# Altium PCB SD171-5.0PCB3.PcbDoc (part 3 of 5)
Units mm, origin at the board's own origin, x right, y up, seen from the top; angles counter-clockwise.
Board outline 152.27 x 99.6 mm, 6 copper layers (Top Layer, InternalPlane1, Mid-Layer 1, Mid-Layer 2, InternalPlane2, Bottom Layer); 397 components, 337 nets, 1868 pads, 651 vias.
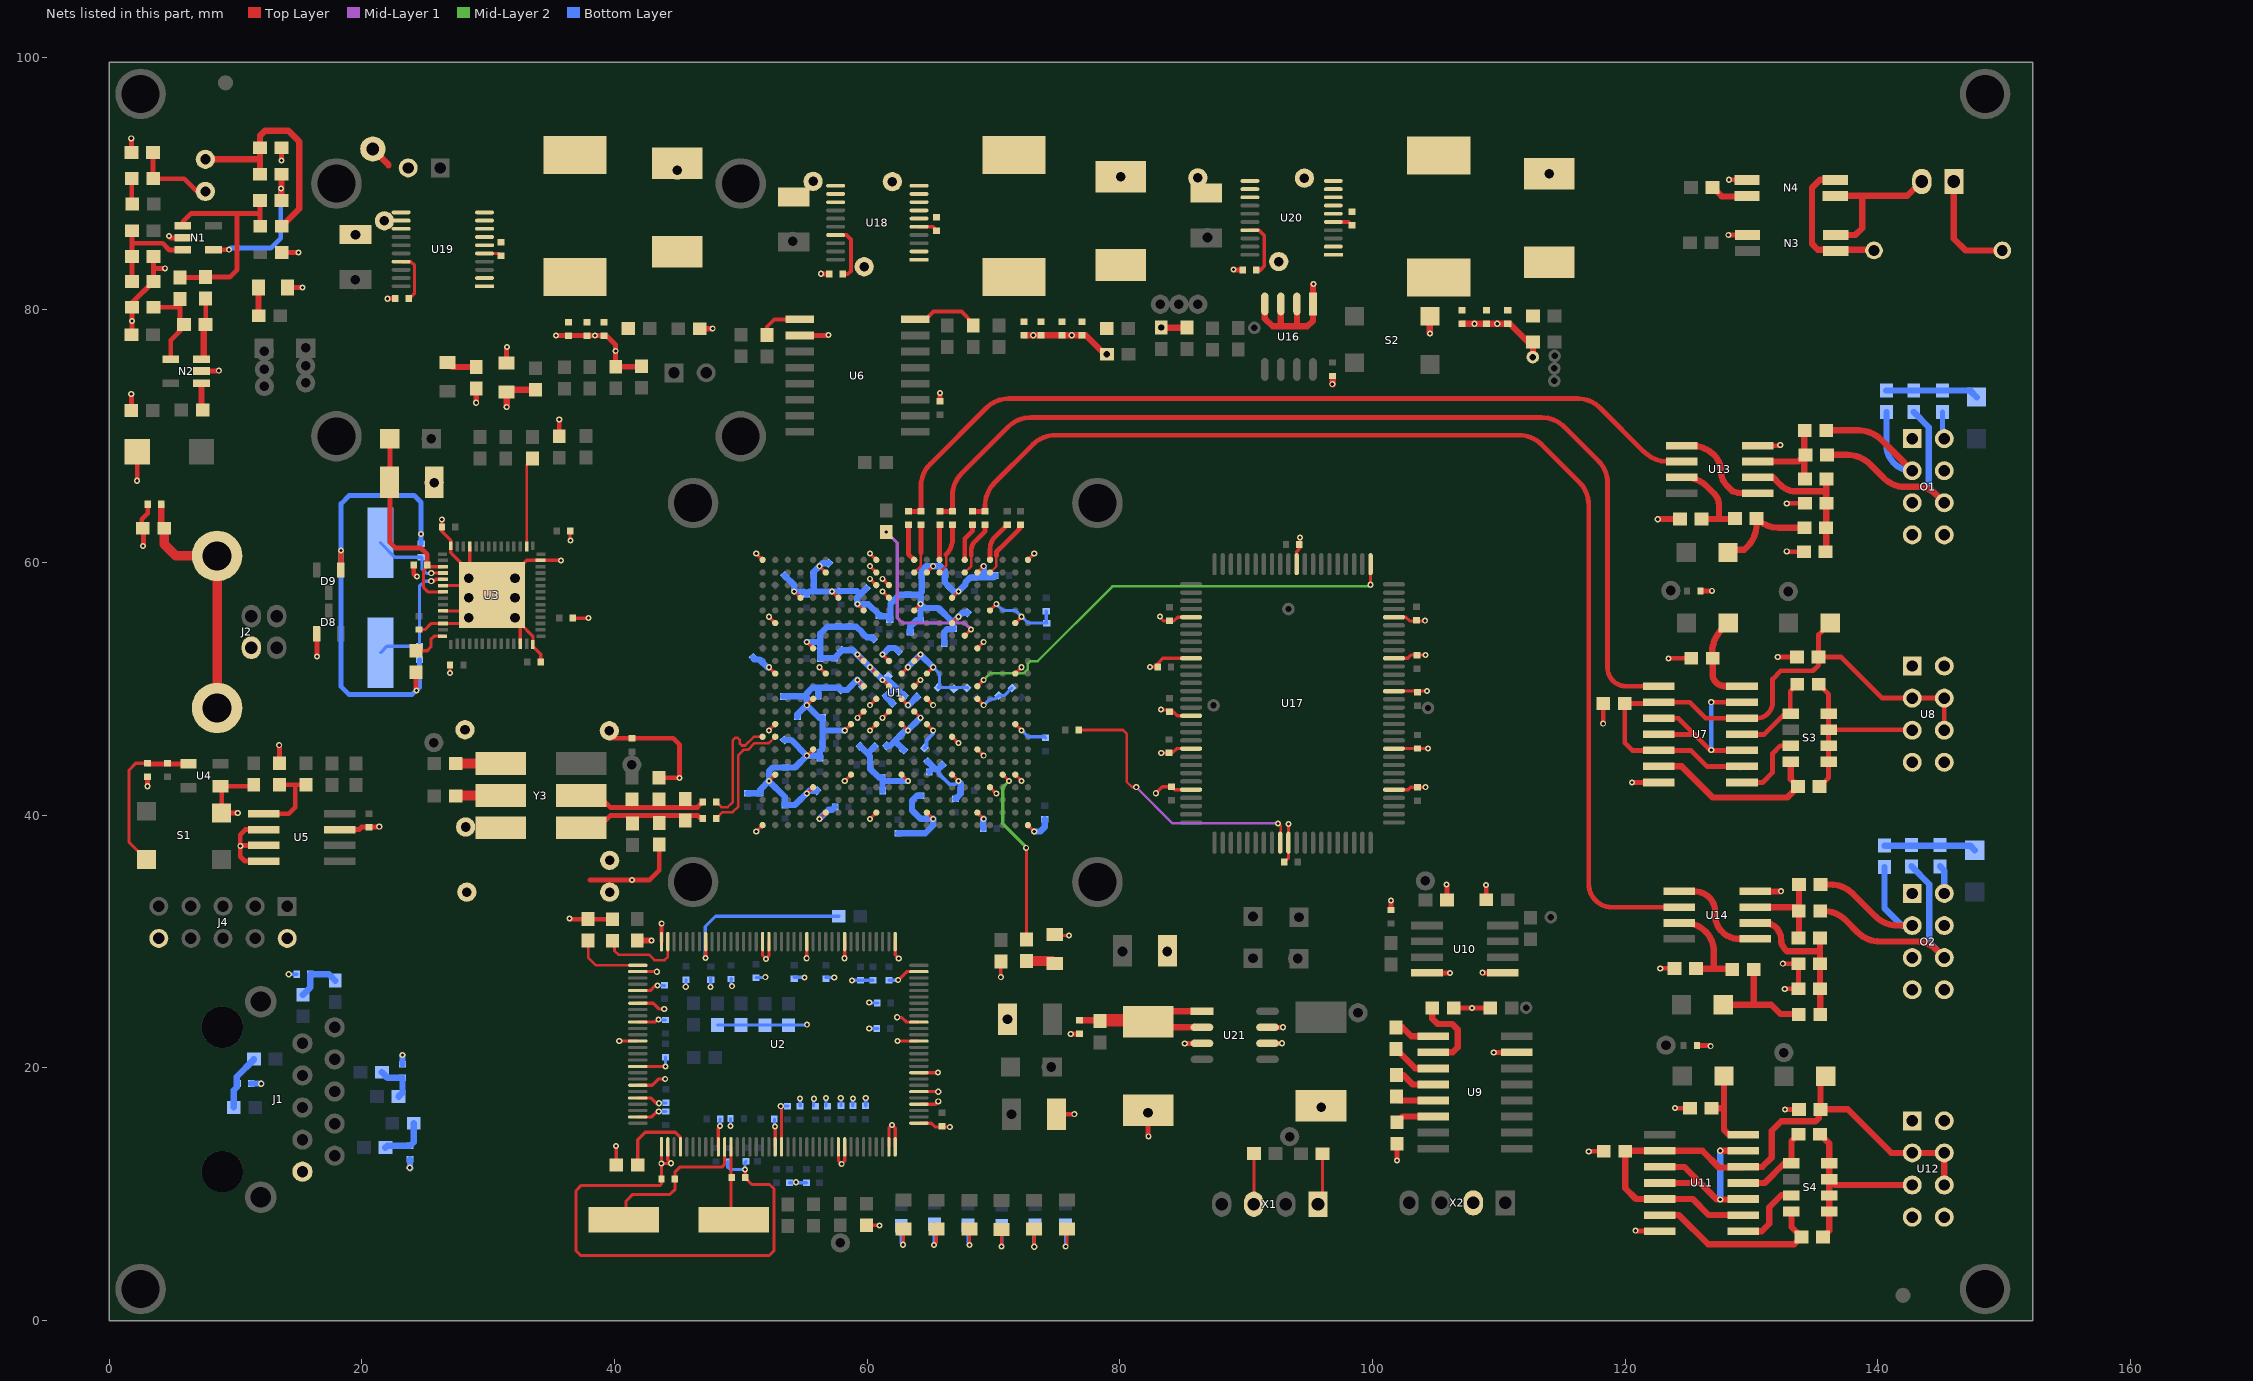
[diagram p7: the nets of this part, all layers, seen from the top]

## Via types
v1: diameter 0.483, hole 0.254, Top Layer to Bottom Layer, 651 vias

## Nets (pads, with @x,y where several pads share a name; then routed paths per layer and width w, separated by ;. In a path a pad name is that pad's centre, name@x,y a point inside that pad or via, vN(x,y) a via of type N, cw(c..) or ccw(c..) an arc to the next point about the centre after c; other vN are vias at no path point) (continued)
GND: C1.1 C2.1 C3.1 C4.1 C5.1 C6.1 C7.1 C8.1 C9.1 C10.1 C11.1 C12.1 C13.2 C14.1 C15.1 C16.1 C17.1 C18.1 C19.1 C20.2 C21.1 C22.1 C23.1 C24.1 C25.1 C26.1 C27.1 C28.1 C29.1 C30.2 C31.1 C32.1 C33.1 C34.1 C35.1 C36.1 C37.1 C38.1 C39.2 C40.1 C41.1 C42.1 C43.1 C44.1 C45.1 C46.1 C47.2 C48.2 C51.2 C53.1 C54.1 C56.2 C57.1 C58.1 C60.1 C61.2 C62.2 C64.1 C66.2 C68.2 C69.1 C71.2 C72.2 C73.2 C74.2 C76.2 C77.2 C78.2 C80.2 C82.1 C83.1 C84.1 C85.1 C86.1 C87.1 C88.1 C89.1 C90.1 C91.1 C92.1 C93.1 C94.1 C95.1 C96.1 C97.1 C98.1 C99.1 C100.1 C101.1 C102.1 C103.1 C104.1 C105.1 C106.1 C107.1 C108.1 C109.1 C110.1 C111.1 C112.1 C113.1 C114.1 C115.1 C116.1 C117.1 C118.1 C119.1 C120.1 C121.1 C122.1 C123.1 C124.1 C125.1 C126.1 C127.1 C128.1 C129.1 C130.1 C131.1 C132.1 C133.1 C134.1 C135.1 C136.1 C137.1 C138.1 C139.1 C140.1 C141.1 C142.1 C143.1 C144.1 C145.1 C146.1 C147.1 C148.1 C149.1 C150.1 C151.1 C152.1 C153.1 C154.1 C156.2 C157.2 C158.1 C159.1 C160.1 C161.1 C162.1 C163.1 C164.1 C165.1 C166.1 C167.1 C168.1 C169.1 C170.1 C171.1 C172.1 C173.1 C174.1 C175.1 C176.1 C177.1 C178.1 C179.1 C180.1 C181.1 C182.1 C183.1 C185.2 C186.2 C187.1 C188.1 C189.1 C190.1 C192.2 C193.2 C194.1 C195.1 C196.1 C197.2 C198.2 C199.1 C200.2 C201.2 C202.2 C204.2 C207.2 D7.2 D8.1 D9.1 D11.2 D12.2 D13.1 J1.10 J2.4 J4.2 J4.10 N1.2 N2.2 N3.3 N4.3 O1.1 O1.3 O1.4 O1.5 O1.7 O1.8 O2.1 O2.3 O2.4 O2.5 O2.7 O2.8 pad.0@55.731,90.174 pad.2@28.172,46.766 pad.2@28.223,39.07 pad.3@39.602,46.69 pad.4@28.324,33.913 pad.4@62.004,90.149 pad.5@25.733,66.324 pad.5@59.769,83.418 pad.6@21.796,87.05 pad.6@95.939,16.88 pad.7 pad.8 pad.9 pad.10@28.476,57.205 pad.10@32.134,57.205 pad.10@71.122,23.862 pad.11@28.476,58.755 pad.11@32.134,58.755 pad.12@20.879,92.735 pad.14@78.975,76.499 pad.14@83.276,78.603 pad.14@112.695,76.263 pad.21 pad.22 pad.23 pad.24 R1.1 R3.1 R13.1 R14.1 R18.2 R19.2 R20.2 R21.2 R26.1 R34.1 R36.1 R37.2 R41.2 R44.1 R47.2 R50.1 R51.1 R59.1 R63.2 R72.1 R86.1 R89.2 R90.2 R98.1 R105.1 R106.2 R110.1 R112.1 R114.1 R116.1 R118.1 S1.1 S2.2 U1.A1 U1.A22 U1.AA5 U1.AA9 U1.AA13 U1.AA17 U1.AB1 U1.AB22 U1.B5 U1.B9 U1.B13 U1.B17 U1.D4 U1.D18 U1.E2 U1.E7 U1.E11 U1.E15 U1.E21 U1.G5 U1.G18 U1.H7 U1.J2 U1.J9 U1.J11 U1.J13 U1.J15 U1.J21 U1.K10 U1.K12 U1.K14 U1.L5 U1.L9 U1.L11 U1.L13 U1.L18 U1.M10 U1.M12 U1.M14 U1.N2 U1.N9 U1.N11 U1.N13 U1.N17 U1.N21 U1.P10 U1.P12 U1.P14 U1.R5 U1.R18 U1.U2 U1.U7 U1.U21 U1.V4 U1.V10 U1.V14 U1.W7 U1.W16 U1.W19 U2.1 U2.9 U2.15 U2.21 U2.22 U2.38 U2.40 U2.43 U2.45 U2.48 U2.51 U2.55 U2.58 U2.60 U2.63 U2.65 U2.66 U2.74 U2.83 U2.84 U2.93 U2.94 U2.101 U2.102 U2.103 U2.106 U2.108 U2.111 U2.116 U2.119 U2.127 U3.6 U3.10 U3.12 U3.26 U3.28 U3.41 U3.53 U3.56 U3.57 U4.1 U5.2 U5.3 U5.4 U5.7 U6.10 U7.7 U8.1 U8.4 U8.5 U8.8 U9.15 U10.4 U10.5 U11.7 U12.1 U12.4 U12.5 U12.8 U13.4 U14.4 U16.1 U16.2 U16.3 U16.4 U17.5 U17.10 U17.17 U17.21 U17.26 U17.40 U17.55 U17.60 U17.67 U17.71 U17.76 U17.90 U18.1 U18.11 U18.12 U18.13 U19.1 U19.11 U19.12 U19.13 U20.1 U20.11 U20.12 U20.13 U21.3 U21.6 U21.7 X2.2 X3.2 Y3.3 | length 603.6
  Top Layer w0.254: C41.1@24.534,54.7 25.031,54.7 25.517,55.186 26.438,55.186 U3.12@26.449,55.175 28.049,55.175 U3.57@30.299,57.425 ; v1(26.343,63.403) 26.343,62.463 27.049,61.757 U3.56@27.049,61.325 27.054,61.32 27.054,60.787 30.299,57.541 U3.57@30.299,57.425 ; U3.10@26.449,56.175 29.049,56.175 U3.57@30.299,57.425 ; U3.6@26.449,58.175 29.549,58.175 U3.57@30.299,57.425 ; v1(26.978,51.262) 26.988,51.272 C42.1@26.988,51.895 ; U3.53@28.549,61.275 28.549,59.175 U3.57@30.299,57.425 ; U3.26@32.549,53.575 U3.57@32.549,55.175 ; C43.1@34.175,52.144 34.175,52.751 33.549,53.377 U3.28@33.549,53.525 33.549,54.175 U3.57@32.549,55.175 ; v1(35.766,60.164) v1@35.777,60.175 ; C48.2@36.498,62.51 36.498,61.778 v1(36.528,61.752) v1(36.528,61.752) ; C44.1@36.69,55.598 37.944,55.598 v1(37.951,55.605) ; v1(40.135,13.822) 40.14,13.817 R3.1@40.14,12.322 ; v1(40.389,22.128) 40.394,22.122 U2.51@41.855,22.122 ; U2.63@41.855,16.122 42.969,16.122 43.412,16.565 43.513,16.565 v1(43.513,16.54) ; U2.60@41.855,17.622 42.888,17.622 43.31,17.2 v1(43.539,17.2) ; U2.58@41.855,18.622 43.005,18.622 43.513,19.131 v1(44.021,19.131) ; U2.55@41.855,20.122 44.045,20.122 v1(44.047,20.121) ; U2.48@41.855,23.622 43.204,23.622 43.412,23.83 v1(43.488,23.83) ; U2.45@41.855,25.122 43.069,25.122 43.524,24.668 v1(43.945,24.668) ; U2.43@41.855,26.122 42.834,26.122 43.234,26.522 v1(43.412,26.522) ; U2.40@41.855,27.622 43.353,27.622 v1(43.361,27.614) ; U2.65@43.73,13.747 43.73,12.439 v1(43.716,12.425) ; U2.66@44.23,13.747 44.23,12.724 v1@44.453,12.501 ; v1(44.478,12.45) 44.453,12.425 v1@44.453,12.501 ; U2.74@48.23,13.747 48.23,15.186 48.415,15.371 48.39,15.397 v1(48.365,15.397) ; v1(50.346,11.968) 50.346,11.993 50.353,11.986 C5.1@50.353,11.308 50.887,10.774 52.276,10.774 52.632,10.418 52.632,5.516 52.276,5.161 37.316,5.161 36.96,5.516 36.96,10.266 37.392,10.698 43.615,10.698 43.728,10.811 C6.1@43.728,11.197 43.728,12.413 v1(43.716,12.425) ; v1(51.233,38.712) U1.A22@51.733,39.212 ; v1(51.233,60.712) U1.AB22@51.733,60.212 ; U2.22@51.73,29.997 51.73,28.897 v1(51.997,28.63) 52.23,28.863 U2.21@52.23,29.997 ; v1(52.233,42.712) U1.E21@52.733,43.212 ; v1(52.233,46.712) U1.J21@52.733,47.212 ; v1(52.233,51.712) U1.N21@52.733,51.212 ; v1(52.233,55.712) U1.U21@52.733,55.212 ; v1@52.708,15.448 52.73,15.426 U2.83@52.73,13.747 ; v1(53.165,16.972) 53.165,16.921 53.23,16.856 U2.84@53.23,13.747 ; v1(54.233,57.712) U1.W19@54.733,57.212 ; v1(55.223,28.681) 55.248,28.706 55.23,28.724 U2.15@55.23,29.997 ; v1(55.233,41.712) U1.D18@55.733,42.212 ; v1(55.233,44.712) U1.G18@55.733,45.212 ; v1(55.233,48.712) U1.L18@55.733,49.212 ; v1(55.233,53.712) U1.R18@55.733,53.212 ; v1(56.233,39.712) U1.B17@56.733,40.212 ; v1(56.233,51.712) U1.N17@56.733,51.212 ; v1(56.233,59.712) U1.AA17@56.733,59.212 ; v1(57.233,57.712) U1.W16@57.733,57.212 ; U2.93@57.73,13.747 57.73,12.661 v1(57.991,12.4) 58.23,12.638 U2.94@58.23,13.747 ; v1(58.22,28.681) 58.22,28.656 58.23,28.645 U2.9@58.23,29.997 ; v1(58.233,42.712) U1.E15@58.733,43.212 ; v1(58.233,46.712) U1.J15@58.733,47.212 ; v1(59.233,47.712) U1.K14@59.733,48.212 ; v1(59.233,50.712) U1.M14@59.733,50.212 ; v1(59.233,52.712) U1.P14@59.733,52.212 ; v1(59.233,56.712) U1.V14@59.733,56.212 ; R26.1@59.966,7.552 60.959,7.552 v1(60.988,7.523) ; v1(60.233,39.712) U1.B13@60.733,40.212 ; v1(60.233,46.712) U1.J13@60.733,47.212 ; v1(60.233,48.712) U1.L13@60.733,49.212 ; v1(60.233,51.712) U1.N13@60.733,51.212 ; v1(60.233,59.712) U1.AA13@60.733,59.212 ; v1(61.233,47.712) U1.K12@61.733,48.212 ; v1(61.233,50.712) U1.M12@61.733,50.212 ; v1(61.233,52.712) U1.P12@61.733,52.212 ; U2.101@61.73,13.747 61.73,15.224 v1(61.979,15.473) 62.23,15.222 U2.102@62.23,13.747 ; U2.1@62.23,29.997 62.23,28.938 v1(62.512,28.656) ; v1(62.385,24.007) 62.36,23.982 62.766,23.982 63.126,23.622 U2.119@64.105,23.622 ; v1(62.411,22.128) 62.416,22.122 U2.116@64.105,22.122 ; v1(62.462,26.954) 63.13,27.622 U2.127@64.105,27.622 ; U1.E11@62.733,43.212 v1(63.233,42.712) ; U1.J11@62.733,47.212 v1(63.233,46.712) ; U1.L11@62.733,49.212 v1(63.233,48.712) ; U1.N11@62.733,51.212 v1(63.233,51.712) ; U1.K10@63.733,48.212 v1(64.233,47.712) ; U1.M10@63.733,50.212 v1(64.233,50.712) ; U1.P10@63.733,52.212 v1(64.233,52.712) ; U1.V10@63.733,56.212 v1(64.233,56.712) ; U2.103@64.105,15.622 65.081,15.622 65.383,15.321 v1(66.551,15.321) ; U2.106@64.105,17.122 65.432,17.122 65.637,17.327 v1(65.637,17.353) ; U2.108@64.105,18.122 65.594,18.122 65.611,18.14 v1(65.637,18.115) ; U2.111@64.105,19.622 65.653,19.622 65.637,19.639 v1(65.611,19.639) ; U1.B9@64.733,40.212 v1(65.233,39.712) ; U1.J9@64.733,47.212 v1(65.233,46.712) ; U1.L9@64.733,49.212 v1(65.233,48.712) ; U1.N9@64.733,51.212 v1(65.233,51.712) ; U1.AA9@64.733,59.212 v1(65.233,59.712) ; U1.E7@66.733,43.212 v1(67.233,42.712) ; U1.H7@66.733,46.212 v1(67.233,45.712) ; U1.U7@66.733,55.212 v1(67.233,55.712) ; U1.W7@66.733,57.212 v1(67.233,57.712) ; U1.B5@68.733,40.212 v1(69.233,39.712) ; U1.G5@68.733,45.212 v1(69.233,44.712) ; U1.L5@68.733,49.212 v1(69.233,48.712) ; U1.R5@68.733,53.212 v1(69.233,53.712) ; U1.AA5@68.733,59.212 v1(69.233,59.712) ; U1.D4@69.733,42.212 v1(70.233,41.712) ; U1.V4@69.733,56.212 v1(70.233,56.712) ; v1(70.59,27.182) 70.591,27.184 R1.1@70.591,28.432 ; U1.E2@71.733,43.212 v1(72.233,42.712) ; U1.J2@71.733,47.212 v1(72.233,46.712) ; U1.N2@71.733,51.212 v1(72.233,51.712) ; U1.U2@71.733,55.212 v1(72.233,55.712) ; U1.A1@72.733,39.212 v1(73.233,38.712) ; U1.AB1@72.733,60.212 v1(73.233,60.712) ; D12.2@74.858,30.553 74.927,30.484 v1(75.974,30.484) ; v1(82.401,51.744) 82.406,51.75 C87.1@82.994,51.75 83.036,51.792 83.036,52.049 83.41,52.424 U17.60@85.653,52.424 ; v1(82.858,41.737) 83.376,42.254 C88.1@84.115,42.254 84.345,42.024 U17.76@85.653,42.024 ; v1(83.188,55.732) 83.188,55.656 83.467,55.376 84.28,55.376 84.577,55.674 U17.55@85.653,55.674 ; v1(83.264,48.366) 83.264,48.341 84.077,48.341 84.544,47.874 U17.67@85.653,47.874 ; v1(83.29,44.937) 83.34,44.937 83.348,44.929 84.171,44.929 84.515,45.274 U17.71@85.653,45.274 ; C84.1@93.034,36.283 93.353,36.602 U17.90@93.353,37.824 93.353,39.268 93.348,39.273 v1(93.348,39.298) ; U17.40@94.003,59.874 94.003,60.858 94.262,61.117 v1(94.262,61.98) ; U17.5@101.703,42.024 102.83,42.024 103.025,42.219 v1(104.194,42.219) ; U17.10@101.703,45.274 104.365,45.274 104.372,45.267 v1(104.397,45.293) ; U17.17@101.703,49.824 104.331,49.824 104.346,49.839 v1(104.321,49.839) ; U17.21@101.703,52.424 102.79,52.424 103.051,52.684 v1(104.194,52.684) ; U17.26@101.703,55.674 102.652,55.674 102.949,55.376 104.118,55.376 104.143,55.402 v1(104.168,55.402) ; U3.57@30.299,57.425 U3.57@32.549,55.175 ; U3.57@30.299,57.425 33.049,60.175 U3.41@34.149,60.175 v1@35.777,60.175 ; v1@35.777,60.175 35.779,60.177 35.792,60.177 35.79,60.175 v1@35.777,60.175 ; v1(43.716,12.425) 44.377,12.425 v1@44.453,12.501
  Top Layer w0.3: U2.38@43.73,29.997 43.73,31.412 v1(43.742,31.424)
  Top Layer w0.381: v1(2.213,66.476) 2.231,66.458 D13.1@2.231,68.761 ; v1(2.695,61.32) 2.721,61.295 2.721,62.67 2.594,62.797 2.594,63.428 3.06,63.894 C47.2@3.06,64.615 ; v1@3.051,42.296 C51.2@3.051,43.04 ; v1(10.188,40.187) 10.087,40.187 S1.1@8.918,40.187 8.918,42.188 U4.1@8.818,42.288 11.331,42.288 R50.1@11.452,42.41 ; v1@10.392,37.622 10.401,37.613 U5.3@12.249,37.613 ; U5.4@12.249,36.363 12.234,36.377 10.747,36.377 10.392,36.733 10.392,38.46 10.794,38.863 U5.2@12.249,38.863 ; v1(13.465,45.547) 13.484,45.527 R47.2@13.484,44.112 ; D8.1@16.453,54.367 16.453,52.566 v1(16.462,52.557) ; U5.7@18.249,38.863 19.786,38.863 19.993,39.07 21.415,39.07 21.441,39.095 v1(21.39,39.095) ; D9.1@18.354,59.425 18.354,60.951 v1(18.367,60.964) ; C40.1@24.125,59.821 24.125,59.092 24.336,58.882 24.362,58.907 v1(24.387,58.907) ; v1@24.285,49.865 R37.2@24.285,51.325 ; R34.1@35.639,69.994 v1(35.639,71.328) ; v1(36.452,31.831) 36.452,31.805 36.427,31.78 36.439,31.767 R13.1@40.008,31.767 ; 38.052,34.879 v1(41.405,34.879) 42.802,34.879 43.558,35.635 R44.1@43.558,37.676 ; pad.3@39.576,46.334 39.823,46.088 C53.1@41.379,46.088 44.649,46.088 45.164,45.572 v1(45.164,42.956) 45.139,42.956 45.133,42.961 R41.2@43.54,42.961 ; C13.2@74.985,16.329 76.399,16.329 v1(76.406,16.337) ; v1(76.127,22.687) 76.136,22.696 C199.1@76.832,22.696 ; C198.2@82.242,16.638 82.242,14.654 82.223,14.635 v1(82.274,14.584) ; C80.2@101.47,32.5 101.47,33.247 v1(101.476,33.253) ; C64.1@101.953,14.004 101.953,12.685 v1(101.959,12.679) ; v1(105.87,34.523) 105.901,34.492 C62.2@105.901,33.302 ; C60.1@106.443,24.737 v1(107.877,24.737) 109.324,24.737 C58.1@109.33,24.743 ; v1(108.994,34.472) 108.969,34.472 109.007,34.434 C61.2@109.007,33.304 ; v1(109.604,21.213) 109.621,21.23 U9.15@111.427,21.23 ; v1(117.122,13.39) 117.14,13.408 C68.2@118.305,13.408 ; v1(118.265,47.248) 118.28,47.263 C56.2@118.28,48.841 ; v1(120.551,42.6) 120.56,42.591 U7.7@122.654,42.591 ; v1(120.831,7.116) 120.865,7.082 U11.7@122.755,7.082 ; v1(122.583,63.428) v1@122.601,63.446 ; v1(122.787,27.868) 122.787,27.894 123.886,27.894 C77.2@123.918,27.861 ; v1(123.447,52.405) 123.465,52.423 C66.2@125.239,52.423 ; v1(123.955,16.819) 123.962,16.812 C73.2@125.138,16.812 ; C139.1@125.691,21.765 126.615,21.765 126.622,21.772 126.673,21.721 v1(126.774,21.721) ; C140.1@125.971,57.757 126.869,57.757 v1(126.876,57.764) ; v1(128.171,85.933) 128.179,85.925 N3.3@129.697,85.925 ; v1(128.222,90.301) 128.23,90.294 N4.3@129.646,90.294 ; U13.4@130.499,69.251 132.28,69.251 132.286,69.245 v1(132.286,69.296) ; v1(132.083,52.532) 132.084,52.53 C57.1@133.612,52.53 ; v1(132.489,28.249) 132.439,28.249 132.431,28.242 C78.2@133.723,28.242 133.723,26.283 R86.1@133.739,26.267 132.666,26.267 v1(132.642,26.243) ; v1(132.667,16.718) 132.642,16.718 132.64,16.716 C69.1@133.765,16.716 ; v1(132.794,64.673) 132.812,64.691 C72.2@134.231,64.691 ; v1@132.87,60.888 132.845,60.863 132.769,60.863 132.77,60.861 R72.1@134.171,60.861
  Top Layer w0.4: v1(1.756,73.334) 1.761,73.329 R105.1@1.761,72.037 ; v1(1.756,93.578) 1.77,93.564 C207.2@1.77,92.453 ; C201.2@1.77,78.026 1.821,78.077 v1(1.821,79.125) C204.2@1.821,80.21 1.821,80.555 C202.2@3.513,82.248 3.522,82.257 3.522,83.342 ; R98.1@3.522,84.223 3.522,83.342 ; v1(4.423,83.291) 3.573,83.291 3.522,83.342 ; v1(4.753,85.856) 4.727,85.856 4.881,85.703 N1.2@5.838,85.703 ; N2.2@7.32,75.156 8.682,75.156 8.69,75.163 v1(8.69,75.188) ; v1(13.643,91.825) 13.648,91.831 R106.2@13.648,92.84 ; C200.2@13.673,84.534 14.962,84.534 14.964,84.536 v1(14.989,84.536) ; D7.2@14.119,81.784 15.303,81.784 v1(15.319,81.767) ; v1(22.05,80.878) 22.057,80.885 C183.1@22.651,80.885 ; v1(29.061,72.648) 29.068,72.656 R51.1@29.068,73.78 ; D11.2@31.475,75.791 31.475,77.044 v1(31.499,77.068) ; v1(35.385,77.982) 35.36,77.982 35.376,77.966 C187.1@36.37,77.966 C188.1@37.818,77.966 v1(38.459,77.966) C189.1@39.164,77.966 39.364,77.966 40.104,77.226 v1(40.104,76.738) R63.2@40.104,75.497 42.107,75.497 R59.1@42.142,75.531 ; C94.1@46.753,78.508 47.773,78.508 v1(47.78,78.516) ; U6.10@54.659,77.975 56.765,77.975 56.797,78.008 v1(56.95,78.008) ; v1(56.366,82.859) 56.367,82.857 C154.1@57.011,82.857 ; v1(65.764,73.41) 65.771,73.403 C45.1@65.771,72.759 ; v1(85.144,21.925) 85.16,21.941 U21.3@86.509,21.941 ; v1(89.005,83.189) 89.032,83.162 C190.1@89.726,83.162 ; U21.6@91.697,21.941 92.831,21.941 v1(92.84,21.95) ; U21.7@91.697,23.211 92.9,23.211 92.916,23.195 v1(92.916,23.22) ; U10.4@104.324,27.523 106.139,27.523 v1(106.15,27.513) ; v1(108.715,27.538) 108.73,27.523 U10.5@110.324,27.523
  Top Layer w0.5: pad.12@20.879,92.735 22.123,91.491 22.123,91.44 ; R110.1@41.805,30.082 42.925,30.082 v1(42.929,30.078) ; C158.1@72.438,77.991 C159.1@73.784,77.991 ; v1(73.155,77.991) C159.1@73.784,77.991 ; C142.1@78.983,76.491 78.812,76.491 77.312,77.991 C161.1@77.01,77.991 v1(76.203,77.991) C160.1@75.435,77.991 C159.1@73.784,77.991 ; R90.2@83.284,78.596 R89.2@85.316,78.596 ; U16.4@91.486,80.47 91.486,79.311 92.103,78.694 92.738,78.694 ; U16.3@92.756,80.47 92.756,78.712 92.738,78.694 ; U16.2@94.026,80.47 94.026,78.701 94.034,78.694 ; U16.1@95.296,80.47 U16.1@95.304,80.463 ; v1(95.329,82.046) 95.304,82.021 U16.1@95.304,80.463 ; v1(96.828,74.122) 96.879,74.122 96.855,74.145 C46.1@96.855,74.767 ; S2.2@104.543,79.498 104.543,78.141 v1(104.549,78.135) ; C194.1@107.109,78.906 v1(108.08,78.906) C195.1@109.04,78.906 v1(109.883,78.906) C196.1@110.716,78.906 110.865,78.906 112.323,77.448 C162.1@112.708,77.448 112.708,76.26 pad.14@112.703,76.255 ; v1@122.601,63.446 C74.2@124.35,63.446 ; U14.4@130.296,33.97 132.317,33.97 v1(132.337,33.99) ; 92.738,78.694 94.034,78.694 ; 94.034,78.694 94.847,78.694 95.304,79.151 U16.1@95.304,80.463
  Mid-Layer 1 w0.254: v1(35.766,60.164) v1@35.766,60.177
  Bottom Layer w0.254: v1(14.227,27.411) C1.1@14.87,27.411 ; v1(43.412,26.522) 43.962,26.522 C8.1@43.972,26.532 ; v1(43.488,23.83) 43.528,23.789 C9.1@44.048,23.789 ; v1(43.513,16.54) 43.522,16.549 C12.1@44.066,16.549 ; v1(43.539,17.2) 43.572,17.233 C11.1@44.072,17.233 ; v1(44.047,20.121) C10.1@44.046,20.84 ; v1@45.672,26.522 C21.1@45.672,26.987 ; v1@45.672,26.522 v1@45.672,26.573 ; v1@47.628,26.522 C18.1@47.628,27.088 ; v1@47.628,26.522 v1@47.653,26.547 ; R21.2@48.163,23.403 55.203,23.403 55.223,23.423 v1(55.248,23.423) ; v1(48.365,15.397) 48.365,15.952 C16.1@48.374,15.961 ; R112.1@48.98,12.594 48.98,12.14 49.152,11.968 v1(50.346,11.968) 50.346,12.537 50.402,12.594 R118.1@50.428,12.619 ; C26.1@49.194,16.001 49.194,15.406 v1(49.203,15.397) ; C31.1@49.228,27.038 C31.1@49.236,27.038 ; C31.1@49.254,27.055 C31.1@49.236,27.038 ; v1(49.304,26.471) 49.236,26.54 C31.1@49.236,27.038 ; C32.1@51.215,27.148 51.962,27.148 51.971,27.157 v1(51.946,27.182) ; C15.1@52.666,15.961 52.666,15.489 v1@52.708,15.448 ; v1(53.165,16.972) 53.174,16.981 C25.1@53.718,16.981 ; R116.1@53.857,10.917 v1@54.562,10.917 ; C33.1@54.238,27.173 55.028,27.173 v1(55.045,27.157) ; v1(54.384,10.952) 54.419,10.917 v1@54.562,10.917 ; v1(54.689,17.581) 54.709,17.601 C17.1@54.709,16.981 ; R114.1@55.203,10.917 v1@54.562,10.917 ; C14.1@55.75,16.981 55.75,17.601 55.756,17.607 v1(55.807,17.556) ; C34.1@56.721,27.165 57.399,27.165 v1(57.407,27.157) ; C27.1@56.741,17.006 56.741,17.601 v1(56.747,17.607) ; C97.1@57.9,57.712 C97.1@57.935,57.748 ; v1(57.915,17.607) 57.935,17.587 C29.1@57.935,17.006 ; v1(58.804,26.928) 58.812,26.936 C22.1@60.455,26.936 ; C24.1@58.875,17.006 58.875,17.576 v1(58.88,17.581) ; C19.1@59.891,17.006 59.891,17.677 59.896,17.683 v1(59.896,17.607) ; v1(60.176,23.118) 60.183,23.111 C36.1@60.87,23.111 ; v1(60.176,25.176) 60.15,25.15 60.099,25.15 60.106,25.143 C23.1@60.845,25.143 ; C28.1@61.75,26.936 62.429,26.936 62.436,26.928 v1(62.462,26.954) ; v1(65.233,51.712) 65.728,51.217 65.728,50.227 C115.1@65.623,50.122 67.934,50.122 C147.1@67.985,50.071 ; v1(69.233,48.712) 69.242,48.712 69.738,49.207 70.156,49.207 C143.1@70.42,49.472 70.873,49.472 C153.1@71.476,50.075 ; v1(70.233,56.712) 70.728,56.217 71.728,56.217 v1(72.233,55.712) 72.242,55.712 72.738,55.217 C146.1@74.216,55.217 ; v1(72.233,46.712) 72.738,46.207 73.027,46.207 ; 73.028,46.207 74.056,46.207 C149.1@74.122,46.141 ; C144.1@74.182,56.138 74.182,55.25 C146.1@74.216,55.217 ; C146.1@74.224,55.209 C146.1@74.216,55.217
  Bottom Layer w0.3: C179.1@64.552,45.332 64.715,45.494 64.715,45.927 65.233,46.445 v1(65.233,46.712) ; 65.662,43.642 65.662,43.312 66.525,42.449 66.978,42.449 67.233,42.703 v1(67.233,42.712)
  Bottom Layer w0.381: C38.1@24.564,52.311 24.564,50.118 24.006,49.56 18.977,49.56 18.367,50.169 v1(18.367,60.964) 18.367,64.673 19.002,65.308 24.158,65.308 24.692,64.774 v1(24.692,62.26) 24.692,61.501 C37.1@24.712,61.481 ; C71.2@145.121,71.926 145.121,69.959 O1.8@145.27,69.81
  Bottom Layer w0.5: C112.1@50.549,41.737 50.558,41.746 C128.1@51.534,41.746 51.534,42.013 v1(52.233,42.712) ; C99.1@50.993,52.47 51.132,52.331 51.489,52.331 52.099,51.721 v1@52.233,51.721 ; C116.1@53.353,49.406 55.174,49.406 55.223,49.357 v1@55.223,48.723 ; C123.1@53.449,45.96 53.986,45.96 v1(55.233,44.712) ; C96.1@53.487,58.969 54.233,58.223 v1(54.233,57.712) 54.998,57.712 C98.1@55.217,57.494 55.436,57.712 v1(57.233,57.712) C97.1@57.9,57.712 ; C119.1@54.48,47.791 54.48,47.98 v1@55.223,48.723 ; 55.223,49.636 55.669,50.082 57.788,50.082 C173.1@57.952,49.918 58.439,49.918 v1(59.233,50.712) 59.654,50.292 C166.1@59.654,50.198 ; v1(55.233,53.712) 56.288,53.712 56.3,53.7 ; 55.792,57.724 C95.1@55.792,59.032 55.792,59.271 v1(56.233,59.712) 56.472,59.951 C101.1@56.961,59.951 ; C126.1@56.021,41.943 55.429,41.943 54.292,40.806 C127.1@53.49,40.806 53.49,41.455 v1(52.233,42.712) ; C117.1@56.146,49.426 56.146,50.015 ; v1(56.233,39.712) 56.955,40.434 57.238,40.434 C130.1@57.467,40.663 ; C97.1@57.935,57.748 59.176,57.748 59.456,57.468 ; v1(58.233,46.712) 56.53,46.712 56.476,46.766 ; C175.1@59.447,45.459 60.009,44.897 ; C100.1@59.933,57.945 59.456,57.468 ; C164.1@60.494,53.963 60.371,54.085 59.973,54.085 59.606,54.453 59.606,54.473 59.151,54.928 C163.1@58.57,54.928 C182.1@57.757,54.928 56.848,54.928 56.3,54.38 56.3,53.7 ; C176.1@60.59,45.433 60.054,44.897 60.009,44.897 ; C124.1@61.227,41.938 61.227,42.676 61.263,42.712 v1(63.233,42.712) ; C122.1@61.227,42.967 C122.1@61.191,43.003 60.915,43.003 60.237,43.682 C121.1@60.237,43.995 60.237,44.669 60.009,44.897 ; v1(61.233,52.712) 61.764,53.243 62.219,53.243 C167.1@62.491,52.97 ; C177.1@61.556,45.511 61.83,45.511 62.213,45.894 ; C178.1@62.016,48.852 61.53,49.338 C174.1@61.53,49.472 62.063,50.004 C170.1@62.063,50.299 ; C131.1@62.461,38.569 64.603,38.569 65.233,39.199 v1(65.233,39.712) 64.232,39.712 63.554,40.39 63.554,41.159 63.934,41.539 C134.1@64.278,41.539 ; C136.1@62.905,45.169 62.213,45.86 62.213,45.894 ; C171.1@62.957,49.459 62.117,50.299 C170.1@62.063,50.299 ; v1(63.233,48.712) 63.295,48.712 C172.1@63.95,49.367 ; v1(63.233,51.712) v1(64.233,52.712) v1(65.233,51.712) ; C168.1@63.421,54.471 63.421,54.939 63.918,55.436 C114.1@64.234,55.436 v1(64.233,56.712) ; v1(64.233,47.712) v1(63.233,46.712) 63.031,46.712 C181.1@62.662,46.343 62.213,45.894 ; C138.1@64.806,44.254 65.418,43.642 65.662,43.642 65.662,43.674 C150.1@65.945,43.957 ; C135.1@64.918,43.438 65.172,43.692 ; C169.1@66.104,53.597 66.104,54.498 66.331,54.725 C113.1@66.799,54.725 ; C113.1@66.825,54.75 C113.1@66.799,54.725 ; C132.1@67.003,41.288 67.424,41.709 C152.1@67.424,41.958 67.424,42.513 v1@67.233,42.703 ; C145.1@67.931,56.034 67.554,56.034 v1(67.233,55.712) 66.799,55.279 ; C133.1@69.202,38.961 69.202,39.681 v1(69.233,39.712) ; v1(69.233,59.712) 69.233,58.926 69.345,58.814 ; C107.1@70.167,58.976 70.005,58.814 69.345,58.814 ; v1(73.233,38.712) 73.712,38.712 74.068,39.068 C151.1@74.068,39.694 ; C76.2@144.929,35.949 145.27,35.609 O2.8@145.27,33.81 ; v1(52.233,42.712) 52.233,43.471 52.539,43.778 C129.1@53.541,43.778 54.298,43.778 v1(55.233,44.712) ; v1@55.223,48.723 v1(55.233,48.712) 56.221,47.724 C118.1@56.502,47.724 56.476,47.699 56.476,46.766 ; v1(55.233,44.712) 56.06,44.712 C125.1@56.258,44.514 56.258,45.058 56.476,45.276 C120.1@56.476,45.667 56.476,46.766 ; 56.3,53.7 C104.1@56.3,52.403 56.336,52.439 C105.1@57.427,52.439 57.962,52.974 C165.1@57.962,53.051 58.895,53.051 v1(59.233,52.712) 59.245,52.712 61.233,50.725 v1(61.233,50.712) 61.649,50.712 C170.1@62.063,50.299 ; 59.456,57.468 59.233,57.245 v1(59.233,56.712) 60.107,56.712 60.957,55.862 C102.1@60.957,55.792 60.992,55.757 61.598,55.757 61.796,55.56 C103.1@61.796,55.462 61.86,55.526 61.86,56.756 62.547,57.443 C137.1@63.243,57.443 64.104,57.443 ; 64.104,57.443 64.326,57.665 C106.1@64.326,58.981 64.326,59.375 64.664,59.712 65.822,59.712 66.145,59.39 66.145,58.438 C108.1@66.502,58.081 66.87,57.712 v1(67.233,57.712) 67.796,58.275 67.796,58.45 68.16,58.814 C111.1@68.501,58.814 69.345,58.814 ; 64.104,57.443 64.24,57.307 64.24,56.719 v1@64.234,56.713 ; v1(64.233,56.712) v1@64.234,56.713 ; v1(64.233,56.712) v1(64.233,56.712) v1@64.234,56.713 ; v1(64.233,56.712) 64.544,56.401 C109.1@65.275,56.401 65.653,56.401 66.776,55.279 66.799,55.279 ; C113.1@66.799,54.725 66.799,55.279
  Bottom Layer w0.508: C2.1@11.267,18.766 12.026,18.766 v1(12.043,18.75) ; v1(23.219,21.01) 23.219,20.959 23.226,20.952 C3.1@23.226,20.293 ; v1(23.803,12.095) 23.828,12.069 23.854,12.069 23.82,12.103 C4.1@23.82,12.761
  other v1: 52.708,15.371 47.603,26.395 45.647,26.42 10.392,37.571 3.051,42.295 24.336,49.865 132.794,60.888
LBO#: U1.M5 U17.31 | length 36.5
  Top Layer w0.203: U17.31@99.825,59.902 99.85,59.876 U17.31@99.853,59.874 ; v1(99.85,58.247) U17.31@99.85,59.874
  Top Layer w0.254: U1.M5@68.733,50.212 v1(69.233,50.712)
  Mid-Layer 2 w0.203: v1(69.233,50.712) 69.763,51.242 72.428,51.242 72.703,51.518 72.703,51.978 72.926,52.201 73.511,52.201 79.416,58.107 79.441,58.132 99.736,58.132 v1(99.85,58.247) v1@99.85,58.348
MCLKIN: C50.2 U1.H21 | length 9.7
  Top Layer w0.203: C50.2@48.07,39.754 48.555,40.238 49.355,40.238 49.812,40.695 49.812,44.759 50.222,45.168 50.564,45.168 51.108,45.712 52.233,45.712 U1.H21@52.733,46.212
MCLKIN/: C49.2 U1.H22 | length 9.7
  Top Layer w0.203: C49.2@48.07,41.049 48.475,40.644 48.974,40.644 49.355,41.025 49.355,45.928 49.558,46.131 49.762,46.131 49.939,45.953 49.939,45.674 50.092,45.521 50.346,45.521 51.037,46.212 U1.H22@51.733,46.212
  Top Layer w0.254: C49.2@48.06,41.059 C49.2@48.07,41.049
MGT_REFCLK0N: U1.W12 | length 0.7
  Top Layer w0.254: v1(61.233,57.712) U1.W12@61.733,57.212
MGT_REFCLK0P: U1.Y12 | length 0.7
  Top Layer w0.254: v1(61.233,58.712) U1.Y12@61.733,58.212
MGT_REFCLK1N: U1.Y13 | length 0.7
  Top Layer w0.254: v1(60.233,58.712) U1.Y13@60.733,58.212
MGT_REFCLK1P: U1.AB13 | length 0.7
  Top Layer w0.254: v1(60.233,60.712) U1.AB13@60.733,60.212
NetC1_2: C1.2 R5.1 R6.1 | length 4.1
  Bottom Layer w0.508: R6.1@15.346,25.791 15.35,25.791 15.929,26.37 15.929,27.404 C1.2@15.936,27.411 17.408,27.411 R5.1@17.911,26.908
NetC2_2: C2.2 R7.1 R8.1 | length 4.5
  Bottom Layer w0.508: R8.1@9.871,16.87 9.871,18.229 10.112,18.47 10.112,19.308 11.471,20.667 R7.1@11.471,20.705
NetC3_2: C3.2 R9.1 R10.1 | length 3.4
  Bottom Layer w0.508: R9.1@21.6,19.655 22.048,19.207 23.207,19.207 C3.2@23.226,19.226 23.226,18.04 R10.1@22.919,17.732
NetC4_2: C4.2 R11.1 R12.1 | length 3.9
  Bottom Layer w0.508: R12.1@21.878,13.694 22.012,13.828 C4.2@23.82,13.828 24.114,14.122 R11.1@24.114,15.617
NetC5_2: C5.2 U2.76 Y1.1 | length 5.9
  Top Layer w0.254: U2.76@49.23,13.747 49.23,12.427 49.228,12.425 49.228,12.4 49.228,8.177 Y1.1@49.433,7.973
NetC6_2: C6.2 U2.75 Y1.2 | length 12.8
  Top Layer w0.254: Y1.2@40.922,8.162 40.922,9.453 41.456,9.987 44.402,9.987 44.809,10.393 44.809,11.79 45.164,12.146 48.492,12.146 48.72,12.374 48.72,13.738 U2.75@48.73,13.747
  Top Layer w0.381: Y1.2@40.733,7.973 Y1.2@40.922,8.162
NetC37_2: C37.2 U3.4 Y2.2 | length 6.5
  Top Layer w0.254: v1(25.505,59.161) 25.519,59.175 U3.4@26.449,59.175
  Bottom Layer w0.254: Y2.2@21.491,61.574 21.491,61.549 22.625,60.415 C37.2@24.712,60.415 24.768,60.358 24.768,59.517 25.149,59.136 v1@25.505,59.136
NetC38_2: C38.2 U3.5 Y2.1 | length 9.9
  Top Layer w0.254: v1@25.708,58.526 25.857,58.675 U3.5@26.449,58.675
  Bottom Layer w0.254: Y2.1@21.491,52.874 21.995,53.377 C38.2@24.564,53.377 24.564,58.119 24.971,58.526 v1(25.505,58.526)
NetC39_1: C39.1 C40.2 L2.1 U3.3 U3.7 | length 17.1
  Top Layer w0.254: C40.2@25.218,59.846 25.187,59.877 25.187,59.821 25.187,59.669 24.895,59.377 24.895,58.018 25.238,57.675 25.809,57.675 U3.7@26.449,57.675 ; C40.2@25.389,59.675 U3.3@26.449,59.675
  Top Layer w0.381: L2.1@22.228,69.804 22.228,61.599 22.685,61.142 24.692,61.142 25.187,60.647 C40.2@25.187,59.877
NetC47_1: C47.1 J2.5 J2.6 R36.2 | length 19.9
  Top Layer w0.508: C47.1@4.127,64.615 4.127,62.966 R36.2@4.377,62.716
  Top Layer w0.762: R36.2@4.377,62.716 4.377,61.442 5.288,60.531 J2.5@8.555,60.531 J2.6@8.555,48.491
NetC49_1: C49.1 R40.1 R41.1 R42.2 Y3.5 | length 10.2
  Top Layer w0.381: Y3.5@37.391,41.559 38.738,41.559 39.678,40.619 46.573,40.619 C49.1@47.003,41.049
NetC50_1: C50.1 R42.1 R43.2 R44.2 Y3.4 | length 10.1
  Top Layer w0.381: Y3.4@37.391,39.019 38.738,39.019 39.703,39.984 46.587,39.984 46.766,39.804 C50.1@47.029,39.804
NetC51_1: C51.1 C52.2 S1.2 U4.3 | length 12.6
  Top Layer w0.254: S1.2@2.949,36.504 1.578,37.876 1.578,43.565 2.119,44.106 C51.1@3.051,44.106
  Top Layer w0.381: C51.1@3.051,44.106 3.091,44.066 U4.3@6.278,44.066
NetC55_1: C55.1 C65.1 S3.5 S3.6 S3.7 S3.8 U8.3 | length 15.4
  Top Layer w0.381: C55.1@135.323,50.365 136.114,49.574 S3.7@136.114,46.764 ; C65.1@135.399,42.263 136.114,42.978 S3.6@136.114,45.494 S3.7@136.114,46.764 ; U8.3@142.73,46.73 142.696,46.764 S3.7@136.114,46.764
NetC55_2: C55.2 S3.1 U7.11 | length 7.1
  Top Layer w0.381: U7.11@129.254,46.401 131.007,46.401 132.64,48.034 S3.1@133.117,48.034 133.074,48.078 133.074,49.818 C55.2@133.621,50.365
NetC56_1: C56.1 C57.2 L4.2 U7.2 U7.5 U7.9 U7.12 U8.2 U8.6 U8.7 | length 50
  Top Layer w0.381: U7.9@129.11,43.718 U7.9@129.254,43.861 126.478,43.861 125.208,45.131 U7.5@122.654,45.131 120.586,45.131 119.981,45.736 C56.1@119.981,48.841 122.553,48.841 U7.2@122.654,48.941 125.107,48.941 126.377,47.671 U7.12@129.254,47.671 130.398,47.671 ccw(c130.398,48.95) 131.677,48.95 131.677,50.779 132.337,51.439 134.877,51.439 135.314,51.876 C57.2@135.314,52.53 ; C57.2@135.233,52.449 cw(c135.314,52.449) C57.2@135.314,52.53 ; L4.2@136.241,55.223 135.314,54.295 C57.2@135.314,52.53 ; U8.6@145.27,46.73 U8.7@145.27,49.27 U8.2@142.73,49.27 140.348,49.27 137.088,52.53 C57.2@135.314,52.53
NetC59_1: C59.1 U9.1 | length 3.3
  Top Layer w0.5: C59.1@101.857,23.207 102.378,23.207 103.085,22.5 U9.1@104.823,22.5
NetC59_2: C59.2 U9.3 | length 3.6
  Top Layer w0.5: C59.2@101.857,21.506 103.403,19.96 U9.3@104.823,19.96
NetC60_2: C60.2 U9.2 | length 6.7
  Top Layer w0.5: C60.2@104.741,24.737 104.741,23.892 105.159,23.474 106.327,23.474 106.759,23.042 106.759,21.62 106.369,21.23 U9.2@104.823,21.23
NetC63_1: C63.1 U9.5 | length 3.1
  Top Layer w0.508: C63.1@101.902,17.737 102.219,17.42 U9.5@104.823,17.42
NetC63_2: C63.2 U9.4 | length 3.2
  Top Layer w0.5: C63.2@101.902,19.439 102.437,19.439 103.187,18.69 U9.4@104.823,18.69
NetC64_2: C64.2 U9.6 | length 3.1
  Top Layer w0.5: C64.2@101.953,15.705 102.397,16.15 U9.6@104.823,16.15
NetC65_2: C65.2 S3.4 U7.6 | length 14.6
  Top Layer w0.508: U7.6@122.654,43.861 124.497,43.861 126.952,41.406 132.841,41.406 C65.2@133.697,42.263 133.117,42.843 S3.4@133.117,44.224
NetC66_1: C66.1 L5.2 U7.14 | length 6.9
  Top Layer w0.508: C66.1@126.901,52.908 cw(c129.441,52.908) 127.645,54.704 L5.2@128.164,55.223 ; C66.1@126.941,52.423 126.941,51.146 ccw(c127.841,51.146) 127.841,50.246 ccw(c127.875,50.246) 127.875,50.211 U7.14@129.254,50.211
NetC67_1: C67.1 C70.1 S4.5 S4.6 S4.7 S4.8 U12.3 | length 15.4
  Top Layer w0.508: C67.1@135.425,14.754 136.165,14.014 S4.7@136.165,11.179 ; C70.1@135.679,6.626 136.165,7.113 S4.7@136.165,11.179 ; U12.3@142.73,10.73 136.614,10.73 S4.7@136.165,11.179
NetC67_2: C67.2 S4.1 U11.11 | length 7
  Top Layer w0.5: U11.11@129.355,10.892 131.058,10.892 132.615,12.449 S4.1@133.168,12.449 133.168,14.199 C67.2@133.723,14.754
NetC68_1: C68.1 C69.2 L6.2 U11.2 U11.5 U11.9 U11.12 U12.2 U12.6 U12.7 | length 49.2
  Top Layer w0.5: U11.9@129.355,8.352 126.631,8.352 125.361,9.622 U11.5@122.755,9.622 120.865,9.622 120.007,10.48 C68.1@120.007,13.408 120.031,13.432 U11.2@122.755,13.432 126.123,13.432 127.435,12.12 129.313,12.12 U11.12@129.355,12.162 130.855,12.162 131.6,12.908 131.6,15.016 132.362,15.778 135.08,15.778 135.323,16.02 135.323,16.572 C69.2@135.466,16.716 ; L6.2@135.886,19.332 135.466,18.913 C69.2@135.466,16.716 ; U12.6@145.27,10.73 U12.7@145.27,13.27 U12.2@142.73,13.27 141.068,13.27 137.622,16.716 C69.2@135.466,16.716
NetC70_2: C70.2 S4.4 U11.6 | length 14.8
  Top Layer w0.5: U11.6@122.755,8.352 124.269,8.352 126.571,6.05 133.4,6.05 C70.2@133.977,6.626 133.168,7.435 S4.4@133.168,8.639
NetC71_1: C71.1 L8.1 R66.1 R67.1 | length 7.4
  Bottom Layer w0.508: R67.1@140.688,73.617 147.304,73.617 L8.1@147.825,73.097
NetC72_1: C72.1 R69.1 R70.1 R72.2 U13.2 | length 12.2
  Top Layer w0.508: U13.2@130.499,66.751 U13.2@131.707,66.751 ; U13.2@131.143,66.751 U13.2@131.707,66.751 ; R72.2@135.873,60.861 135.933,60.921 R70.1@135.933,66.621 ; 135.918,65.638 133.505,65.638 cw(c133.505,67.294) 132.335,66.123 U13.2@131.707,66.751
NetC73_1: C73.1 L9.2 U11.14 | length 7
  Top Layer w0.508: C73.1@126.839,16.812 127.79,16.812 127.834,16.768 ; L9.2@127.834,19.358 127.834,16.768 ; U11.14@129.355,14.702 128.231,14.702 127.834,15.099 127.834,16.768
NetC74_1: C74.1 R68.1 U13.7 | length 7.8
  Top Layer w0.381: U13.7@124.499,66.751 U13.7@124.711,66.751 ; 127.435,63.446 127.46,63.446 ; R68.1@128.679,63.446 R68.1@128.71,63.478
  Top Layer w0.5: U13.7@124.711,66.751 cw(c124.711,64.211) 126.507,66.007 127.054,65.46 cw(c126.134,64.54) 127.435,64.54 127.435,63.446 C74.1@126.052,63.446 ; 127.46,63.446 R68.1@128.679,63.446
NetC75_1: C75.1 R70.2 R71.1 U13.3 | length 7.8
  Top Layer w0.508: U13.3@130.499,68.001 133.716,68.001 R71.1@134.222,68.507 ; C75.1@134.198,70.43 134.198,66.654 R70.2@134.231,66.621
NetC75_2: C75.2 O1.2 R67.2 | length 14.9
  Top Layer w0.5: C75.2@135.924,70.463 138.485,70.463 cw(c138.485,67.923) 140.281,69.719 141.285,68.715 141.528,68.472 O1.2@142.73,67.27
  Bottom Layer w0.5: R67.2@140.688,71.916 140.688,70.337 ; O1.2@142.73,67.27 cw(c142.73,69.312) 140.688,69.312 ; 140.688,69.312 140.688,70.337 ; 140.688,69.312 140.688,70.337
NetC76_1: C76.1 L10.1 R74.1 R75.1 | length 7.3
  Bottom Layer w0.508: R74.1@140.535,37.6 147.304,37.6 L10.1@147.673,37.232
NetC77_1: C77.1 R76.1 U14.7 | length 8.3
  Top Layer w0.5: U14.7@124.296,31.47 124.747,31.47 cw(c124.747,29.189) 125.896,31.16 cw(c124.747,29.189) 126.718,30.337 cw(c124.747,29.189) 127.028,29.189 127.028,27.861 ; C77.1@125.62,27.861 127.028,27.861 ; R76.1@128.481,27.791 128.411,27.861 127.028,27.861
NetC78_1: C78.1 R79.1 R82.1 R86.2 U14.2 | length 12.6
  Top Layer w0.5: U14.2@130.296,31.47 131.002,31.47 cw(c131.002,30.013) 132.032,31.043 ; 131.931,31.144 cw(c130.891,30.103) 132.362,30.103 ccw(c133.344,30.103) 132.65,29.41 132.82,29.24 133.353,29.24 135.36,29.24 ; R82.1@135.425,30.274 C78.1@135.425,28.242 135.425,26.283 R86.2@135.441,26.267 135.441,24.237 R79.1@135.45,24.229
NetC79_1: C79.1 R82.2 R87.2 U14.3 | length 7.8
  Top Layer w0.5: U14.3@130.296,32.72 133.461,32.72 R87.2@133.748,32.433 ; R82.2@133.723,30.274 133.765,30.316 C79.1@133.765,34.522
NetC79_2: C79.2 O2.2 R74.2 | length 14.7
  Top Layer w0.5: C79.2@135.466,34.522 136.239,34.522 cw(c136.239,31.982) 138.035,33.778 139.799,32.014 ccw(c141.595,33.81) 140.657,31.45 ccw(c141.595,33.81) 141.595,31.27 O2.2@142.73,31.27 O2.2@142.55,31.45
  Bottom Layer w0.5: R74.2@140.535,35.898 140.535,32.649 141.915,31.27 O2.2@142.73,31.27
NetC81_2: C81.2 U17.89 | length 22.6
  Top Layer w0.203: C81.2@76.965,46.747 80.26,46.747 80.546,46.461 80.546,42.651 80.978,42.219 v1(81.308,42.219) 81.334,42.219 81.359,42.245 v1@81.308,42.245 ; v1(92.535,39.349) 92.738,39.146 92.738,37.859 U17.89@92.703,37.824
  Mid-Layer 1 w0.203: v1(81.308,42.219) 84.179,39.349 v1(92.535,39.349)
NetC154_2: C154.2 U18.17 | length 4.6
  Top Layer w0.3: U18.17@57.513,85.927 58.378,85.927 58.728,85.577 58.728,83.088 58.474,82.834 58.101,82.834 C154.2@58.078,82.857
NetC155_1: C155.1 L14.2 U18.6 U18.7 U18.8 U18.9 U18.10
NetC155_2: C155.2 U18.5 | length 1.5
  Top Layer w0.3: U18.5@64.113,86.577 65.209,86.577 C155.2@65.508,86.278
NetC157_1: C157.1 C158.2 C159.2 C160.2 C161.2 L14.1 R93.1 U18.2
NetC183_2: C183.2 U19.17 | length 4
  Top Layer w0.254: U19.17@23.121,83.819 23.885,83.819 24.184,83.52 24.184,81.31 23.759,80.885 C183.2@23.718,80.885
NetC184_1: C184.1 L15.2 U19.6 U19.7 U19.8 U19.9 U19.10
NetC184_2: C184.2 U19.5 | length 1.4
  Top Layer w0.254: U19.5@29.756,84.434 U19.5@29.721,84.469 30.845,84.469 C184.2@31.023,84.291
NetC186_1: C186.1 C187.2 C188.2 C189.2 L15.1 R94.1 U19.2
NetC190_2: C190.2 U20.17 | length 4.5
  Top Layer w0.3: U20.17@90.304,86.308 91.017,86.308 91.443,85.882 91.443,83.469 91.136,83.162 C190.2@90.793,83.162
NetC191_1: C191.1 L16.2 U20.6 U20.7 U20.8 U20.9 U20.10
NetC191_2: C191.2 U20.5 | length 1.6
  Top Layer w0.3: U20.5@96.904,86.958 98.13,86.958 C191.2@98.384,86.704
NetC193_1: C193.1 C194.2 C195.2 C196.2 L16.1 R95.1 U20.2
NetC198_1: C198.1 C199.2 R96.2 U21.1 U21.2 | length 14.5
  Top Layer w0.5: C199.2@76.832,23.762 78.376,23.762 R96.2@78.432,23.706 ; C198.1@82.118,23.762 C198.1@82.242,23.638 ; U21.2@86.509,23.211 82.669,23.211 C198.1@82.242,23.638 ; U21.1@86.509,24.481 83.086,24.481 C198.1@82.242,23.638
  Top Layer w1: R96.2@78.432,23.762 C198.1@82.118,23.762
NetC202_1: C202.1 N1.3 R97.1 R98.2 | length 8.3
  Top Layer w0.381: C202.1@1.812,82.248 1.812,85.272 ; R97.1@1.812,86.261 1.812,85.272 ; N1.3@5.838,84.763 5.814,84.739 4.778,84.739 4.245,85.272 1.812,85.272
NetC203_1: C203.1 N2.3 R100.2 | length 4.9
  Top Layer w0.381: C203.1@7.637,78.661 7.648,78.672 R100.2@7.648,80.891
  Top Layer w0.508: N2.3@7.32,76.095 7.496,76.272 7.496,78.52 C203.1@7.637,78.661
NetC203_2: C203.2 C204.1 N2.4 R101.2 | length 7.4
  Top Layer w0.381: C204.1@3.522,80.21 5.616,80.21 ; N2.4@4.888,76.095 4.888,77.613 5.935,78.661 5.616,78.98 5.616,80.21 ; R101.2@5.616,80.865 5.616,80.21
NetC205_1: C205.1 N1.1 R100.1 R101.1 R104.1 | length 17.8
  Top Layer w0.381: R101.1@5.616,82.567 7.623,82.567 R100.1@7.648,82.593 9.541,82.593 10.138,83.189 10.138,87.584 ; N1.1@5.838,86.668 5.838,86.967 6.505,87.634 11.89,87.634 ; R104.1@11.946,88.649 11.946,86.642 C205.1@11.972,86.617
NetC205_2: C205.2 C206.1 LT1.2 R106.1 | length 18.3
  Top Layer w0.508: LT1.2@7.624,91.92 11.928,91.92 11.946,91.902 ; C206.1@11.946,90.732 11.946,91.902 ; C205.2@13.673,86.617 15.065,88.009 15.065,93.324 14.202,94.188 12.347,94.188 11.946,93.786 R106.1@11.946,92.84 11.946,91.902
NetC206_2: C206.2 N1.4 R104.2 | length 11.7
  Top Layer w0.381: N1.4@8.27,84.763 9.45,84.763 9.452,84.764 v1(9.503,84.764)
  Top Layer w0.508: R104.2@13.648,88.649 C206.2@13.648,90.732
  Bottom Layer w0.381: v1(9.503,84.764) 9.63,84.891 12.805,84.891 13.592,85.679 13.592,89.59 v1(13.617,89.616)
NetC207_1: C207.1 LT1.1 R102.1 | length 6.7
  Top Layer w0.381: C207.1@3.472,92.453 R102.1@3.472,90.421 ; R102.1@3.497,90.396 R102.1@3.472,90.421 ; LT1.1@7.624,89.38 6.945,89.38 5.947,90.378 3.515,90.378 R102.1@3.472,90.421
NetD1_1: D1.1 R15.2 | length 3.1
  Top Layer w0.254: v1(68.1,5.973) 68.1,5.872 68.102,5.873 D1.1@68.102,7.236
  Bottom Layer w0.254: R15.2@67.993,7.552 67.993,6.081 v1(68.1,5.973)
NetD2_1: D2.1 R16.2 | length 3.1
  Top Layer w0.254: v1(75.72,5.872) 75.823,5.975 D2.1@75.823,7.261
  Bottom Layer w0.254: R16.2@75.714,7.552 75.714,5.878 v1(75.72,5.872)
NetD3_1: D3.1 R17.2 | length 3.1
  Top Layer w0.254: v1(73.231,5.846) 73.233,5.848 D3.1@73.233,7.236
  Bottom Layer w0.254: v1(73.231,5.846) 73.231,7.456 R17.2@73.301,7.527
NetD4_1: D4.1 R22.2 | length 3
  Top Layer w0.254: v1(70.64,5.872) 70.64,7.209 D4.1@70.642,7.211
  Bottom Layer w0.254: v1(70.64,5.872) 70.66,5.891 R22.2@70.66,7.476
NetD5_1: D5.1 R27.2 | length 2.8
  Top Layer w0.254: v1(62.843,5.999) 62.868,5.999 62.869,6 D5.1@62.869,7.261
  Bottom Layer w0.254: R27.2@62.71,7.501 62.71,6.132 v1(62.843,5.999)
NetD6_1: D6.1 R28.2 | length 3
  Top Layer w0.254: v1(65.306,5.973) 65.486,6.153 D6.1@65.486,7.236
  Bottom Layer w0.254: v1(65.306,5.973) 65.326,5.993 R28.2@65.326,7.628
NetD7_1: D7.1 R35.1 | length 2.3
  Top Layer w0.508: D7.1@11.833,81.784 11.833,79.542 R35.1@11.845,79.53
NetD10_2: D10.2 R51.2 | length 2.4
  Top Layer w0.5: D10.2@26.801,75.841 27.161,75.482 R51.2@29.068,75.482
NetD11_1: D11.1 R55.2 | length 3.5
  Top Layer w0.5: v1(31.474,72.318) 31.474,73.503 31.648,73.677 R55.2@33.76,73.677
NetD12_1: D12.1 R92.2 | length 2.3
  Top Layer w0.762: R92.2@72.622,28.465 74.66,28.465 D12.1@74.858,28.267
NetL7_1: L7.1 R68.2 R69.2 | length 9.2
  Top Layer w0.381: L7.1@128.227,60.837 ccw(c128.227,60.725) L7.1@128.147,60.805 ; L7.1@128.535,60.837 cw(c128.147,63.114) L7.1@128.147,60.805 ; L7.1@128.656,61.015 ccw(c128.656,60.296) L7.1@128.147,60.805 ; R68.2@130.412,63.038 R68.2@130.412,63.478 ; 133.607,62.717 134.162,62.717 R69.2@134.205,62.76
  Top Layer w0.5: L7.1@128.656,61.015 129.441,61.015 129.668,61.242 ccw(c127.872,63.038) R68.2@130.412,63.038 ; R68.2@130.412,63.478 ccw(c132.143,65.209) 132.143,62.76 R69.2@134.205,62.76
NetL11_1: L11.1 R76.2 R79.2 | length 9.1
  Top Layer w0.5: L11.1@127.766,24.991 130.183,24.991 ; R76.2@130.183,27.791 130.183,24.991 ; R79.2@133.748,24.229 133.715,24.261 132.312,24.261 131.582,24.991 130.183,24.991
NetN2_1: N2.1 R103.2 | length 2.2
  Top Layer w0.508: N2.1@7.32,74.19 7.32,72.168 R103.2@7.425,72.063
NetN3_1: N3.1 N4.2 R108.2 | length 11.7
  Top Layer w0.5: N4.2@136.631,90.294 135.428,90.294 134.801,89.666 134.801,85.221 135.258,84.764 139.646,84.764 R108.2@139.704,84.706
NetN3_2: N3.2 N4.1 X4.2 | length 12.2
  Top Layer w0.5: N4.1@136.631,89.024 138.763,89.024 ; N3.2@136.682,85.925 138.222,85.925 138.763,86.466 138.763,89.024 ; X4.2@143.489,90.167 142.346,89.024 138.763,89.024
NetN4_4: N4.4 R109.1 | length 3
  Top Layer w0.5: R109.1@126.916,89.684 126.96,89.684 127.663,88.981 129.603,88.981 N4.4@129.646,89.024
NetO1_6: O1.6 R66.2 R71.2 | length 18.8
  Top Layer w0.5: R71.2@135.976,68.525 137.593,68.525 cw(c137.593,65.985) 139.389,67.781 140.494,66.676 ccw(c142.141,68.324) 142.141,65.994 143.183,65.994 cw(c143.183,64.005) 144.588,65.412 ; 144.589,65.411 O1.6@145.27,64.73
  Bottom Layer w0.5: R66.2@142.847,71.916 144.046,70.716 144.046,65.954 O1.6@145.27,64.73
NetO2_6: O2.6 R75.2 R87.1 | length 19.3
  Top Layer w0.5: R87.1@135.45,32.433 135.661,32.433 cw(c135.661,29.893) 137.457,31.689 138.4,30.746 ccw(c140.196,32.542) 140.196,30.002 143.056,30.002 cw(c143.056,27.727) 144.665,29.335 O2.6@145.27,28.73
  Bottom Layer w0.5: R75.2@142.669,35.949 144.072,34.546 144.072,32.643 144.072,29.928 O2.6@145.27,28.73
NetR3_2: R3.2 U2.68 | length 6.6
  Top Layer w0.254: R3.2@41.842,12.322 41.842,14.31 42.446,14.914 44.834,14.914 45.23,14.518 U2.68@45.23,13.747
NetR13_2: R13.2 U2.37 | length 6.6
  Top Layer w0.203: R13.2@40.008,30.065 40.008,29.265 40.313,28.96 42.726,28.96 43.158,28.529 43.97,28.529 44.23,28.788 U2.37@44.23,29.997
NetR14_2: R14.2 U2.39 | length 5.5
  Top Layer w0.203: R14.2@37.925,30.091 37.925,28.757 38.56,28.122 U2.39@41.855,28.122
NetR29_2: R29.2 X1.1 | length 4.1
  Top Layer w0.254: X1.1@95.691,9.211 96.046,9.566 R29.2@96.046,13.211
NetR30_2: R30.2 X1.3 | length 4
  Top Layer w0.254: X1.3@90.611,9.211 90.619,9.219 R30.2@90.619,13.23
NetR37_1: R37.1 U3.14 | length 3
  Top Layer w0.254: R37.1@24.285,53.027 25.187,53.027 25.479,53.319 25.479,53.929 25.733,54.183 26.392,54.183 U3.14@26.399,54.175
NetR38_2: R38.2 Y3.2 | length 3.6
  Top Layer w0.762: R38.2@27.44,41.532 27.467,41.559 Y3.2@30.991,41.559
NetR39_2: R39.2 Y3.1 | length 3.6
  Top Layer w0.762: R39.2@27.44,44.097 30.99,44.097 Y3.1@30.991,44.099
NetR45_2: R45.2 U3.44 | length 7.2
  Top Layer w0.203: U3.44@33.049,61.275 33.049,67.76 R45.2@33.531,68.242
NetR46_1: R46.1 R47.1 U5.1 | length 6.5
  Top Layer w0.381: U5.1@12.249,40.113 14.229,40.113 14.735,40.619 14.735,42.346 ; R47.1@13.484,42.41 R46.1@15.593,42.41
NetR56_1: R56.1 U6.9 | length 3.5
  Top Layer w0.3: R56.1@52.073,78.021 52.073,78.668 52.65,79.245 U6.9@54.659,79.245
NetR61_2: R61.2 U6.8 | length 5.4
  Top Layer w0.3: U6.8@63.809,79.245 64.639,79.245 65.256,79.862 67.465,79.862 68.407,78.921 R61.2@68.407,78.775
NetR73_2: R73.2 U1.AA10 | length 6.2
  Top Layer w0.203: U1.AA10@63.733,59.212 64.254,59.734 64.254,62.841 R73.2@64.392,62.979
  Top Layer w0.381: 64.254,60.78 ccw(c64.254,60.79) 64.265,60.79 R73.2@64.265,62.979
NetR77_2: R77.2 U1.AB10 | length 4.7
  Top Layer w0.203: 63.351,61.269 63.351,62.903 R77.2@63.426,62.979
  Top Layer w0.381: R77.2@63.274,62.979 63.274,60.671 U1.AB10@63.733,60.212
NetR78_2: R78.2 U1.AA8 | length 4.9
  Top Layer w0.203: U1.AA8@65.733,59.212 66.254,59.734 66.254,60.634
  Top Layer w0.381: 66.254,60.634 ccw(c65.049,61.84) 66.754,61.84 66.754,62.209 ; 66.754,61.616 66.754,62.209 ; 66.754,62.412 66.754,62.209 ; R78.2@66.754,62.979 66.754,62.209
NetR80_2: R80.2 U1.AB8 | length 5.5
  Top Layer w0.203: U1.AB8@65.733,60.212 R80.2@65.733,62.948
  Top Layer w0.254: R80.2@65.733,62.948 R80.2@65.763,62.979
  Top Layer w0.381: U1.AB8@65.733,60.271 65.733,62.948 cw(c65.763,62.948) R80.2@65.763,62.979
NetR81_2: R81.2 U1.AA4 | length 6.7
  Top Layer w0.203: U1.AA4@69.733,59.212 70.229,59.708 70.229,60.533 ; R81.2@72.131,62.963 R81.2@72.131,63.004
  Top Layer w0.381: 70.241,60.533 70.241,60.837 70.923,61.52 ; R81.2@72.131,62.963 72.131,62.728 70.923,61.52 ; R81.2@72.131,63.004 cw(c71.464,63.004) 71.936,62.532 70.923,61.52
NetR83_2: R83.2 U1.AB4 | length 3.3
  Top Layer w0.381: U1.AB4@69.733,60.212 69.733,61.063 cw(c71.126,61.063) 70.141,62.048 ; 70.141,62.048 R83.2@71.097,63.004
NetR84_2: R84.2 U1.AA6 | length 4.4
  Top Layer w0.203: U1.AA6@67.733,59.212 68.254,59.734 68.254,60.558
  Top Layer w0.381: 68.254,60.558 68.254,60.969 cw(c69.29,60.969) 68.558,61.701 69.345,62.488 R84.2@69.345,63.004
NetR85_2: R85.2 U1.AB6 | length 3
  Top Layer w0.381: U1.AB6@67.733,60.212 67.733,61.892 68.354,62.513 R85.2@68.354,62.979
NetR88_1: R88.1 U1.T6 | length 14.1
  Top Layer w0.254: U1.T6@67.733,54.212 v1(68.233,54.712)
  Mid-Layer 1 w0.254: v1(61.516,62.416) 62.385,61.546 62.385,55.63 62.808,55.208 63.427,55.208 67.738,55.208 v1(68.233,54.712)
NetR92_1: R92.1 U1.E3 | length 14.2
  Top Layer w0.254: U1.E3@70.733,43.212 v1(71.233,42.712) ; v1(72.596,37.419) 72.622,37.393 R92.1@72.622,30.167
  Mid-Layer 2 w0.254: v1(71.233,42.712) 70.738,42.217 70.738,39.328 72.596,37.469 v1(72.596,37.419)
NetR99_1: R99.1 R102.2 | length 2
  Top Layer w0.381: R102.2@1.795,90.396 1.795,88.412 R99.1@1.837,88.37
NetR108_1: R108.1 X4.1 | length 8.8
  Top Layer w0.5: X4.1@146.029,90.167 146.029,85.626 146.949,84.706 R108.1@149.864,84.706
NetR119_1: R119.1 U2.31 | length 14.7
  Top Layer w0.254: v1(47.222,28.706) 47.23,28.715 U2.31@47.23,29.997
  Bottom Layer w0.254: v1@47.196,28.706 47.196,31.196 48.003,32.002 R119.1@57.759,32.002
NetS3_3: S3.3 U7.8 | length 5.9
  Top Layer w0.381: U7.8@129.254,42.591 130.88,42.591 131.677,43.388 131.677,44.886 132.286,45.496 132.288,45.494 S3.3@133.117,45.494
NetS4_3: S4.3 U11.8 | length 5.7
  Top Layer w0.5: U11.8@129.355,7.082 130.83,7.082 131.423,7.675 131.423,8.971 132.361,9.909 S4.3@133.168,9.909
NetU7_3: U7.3 U7.4 U7.10 U7.13 | length 16.7
  Top Layer w0.381: U7.4@122.654,46.401 125.488,46.401 ; U7.3@122.654,47.671 124.218,47.671 125.488,46.401 ; v1(126.825,48.95) 126.834,48.941 U7.13@129.254,48.941 ; U7.10@129.254,45.131 126.758,45.131 125.488,46.401
  Bottom Layer w0.381: v1(126.825,45.166) v1(126.825,48.95)
NetU11_3: U11.3 U11.4 U11.10 U11.13 | length 16.6
  Top Layer w0.5: U11.4@122.755,10.892 125.945,10.892 ; U11.3@122.755,12.162 124.675,12.162 125.945,10.892 ; v1(127.536,13.441) 127.545,13.432 U11.13@129.355,13.432 ; U11.10@129.355,9.622 129.313,9.58 127.613,9.58 127.257,9.58 125.945,10.892
  Bottom Layer w0.5: v1(127.536,9.58) v1(127.536,13.441)
NetU13_1: U13.1 U13.5 | length 8.1
  Top Layer w0.381: U13.5@124.547,69.27 ccw(c124.547,69.203) U13.5@124.499,69.251 U13.5@125.259,69.251 ; U13.1@129.361,65.501 U13.1@130.499,65.501
  Top Layer w0.5: U13.5@125.259,69.251 cw(c125.259,66.711) 127.055,68.507 cw(c125.771,67.223) 127.587,67.223 ccw(c129.169,67.223) 128.051,66.104 128.506,65.649 ccw(c129.361,68.041) U13.1@129.361,65.501
NetU14_1: U14.1 U14.5 | length 8.5
  Top Layer w0.5: U14.5@124.296,33.97 125.524,33.97 cw(c125.524,32.364) 127.13,32.364 ; 127.13,32.085 127.13,32.364 ; U14.1@130.296,30.22 129.01,30.22 cw(c129.01,32.1) 127.13,32.1 127.13,32.364
OPRX1: R73.1 R77.1 U13.6 | length 68.3
  Top Layer w0.381: R77.1@63.274,64.045 R73.1@64.265,64.045 64.265,66.019 cw(c66.805,66.019) 65.155,67.951 69.439,72.235 cw(c71.235,70.439) 71.235,72.979 116.248,72.979 cw(c116.248,70.439) 118.044,72.235 121.534,68.745 ccw(c123.33,70.541) 123.33,68.001 U13.6@124.499,68.001
OPRX2: R84.1 R85.1 U14.6 | length 93.9
  Top Layer w0.203: R85.1@68.354,64.045 cw(c68.379,64.045) 68.379,64.071 R84.1@69.345,64.071 ccw(c69.345,64.122) R84.1@69.396,64.122
  Top Layer w0.381: R85.1@68.354,64.045 69.319,64.045 ccw(c69.319,64.071) R84.1@69.345,64.071 69.345,64.509 cw(c71.885,64.509) 69.396,65.017 cw(c71.885,64.509) 69.466,65.284 cw(c71.885,64.509) 70.089,66.305 73.122,69.339 cw(c74.918,67.543) 74.918,70.083 110.747,70.083 111.6,70.083 cw(c111.6,67.543) 113.396,69.339 116.378,66.357 cw(c114.582,64.56) 117.122,64.56 117.122,34.548 ccw(c118.951,34.548) 118.951,32.72 U14.6@124.296,32.72
OPTX1: R78.1 R80.1 U7.1 | length 79.1
  Top Layer w0.381: R80.1@65.763,64.045 R78.1@66.754,64.045 66.754,65.271 cw(c69.294,65.271) 67.498,67.067 71.174,70.743 cw(c72.952,68.965) 72.952,71.48 113.403,71.48 cw(c113.403,68.94) 115.199,70.736 117.554,68.381 117.877,68.058 cw(c116.081,66.262) 118.621,66.262 118.621,51.668 ccw(c120.078,51.668) 120.078,50.211 U7.1@122.654,50.211